# Altium PCB USB TO TTL PCB.PcbDoc
Units mm, origin at the board's own origin, x right, y up, seen from the top; angles counter-clockwise.
Board outline 60 x 50 mm, 4 copper layers (Top Layer, Layer 1, Layer 2, Bottom Layer), stack 1.592 mm thick; 41 components, 29 nets, 208 pads, 64 vias.
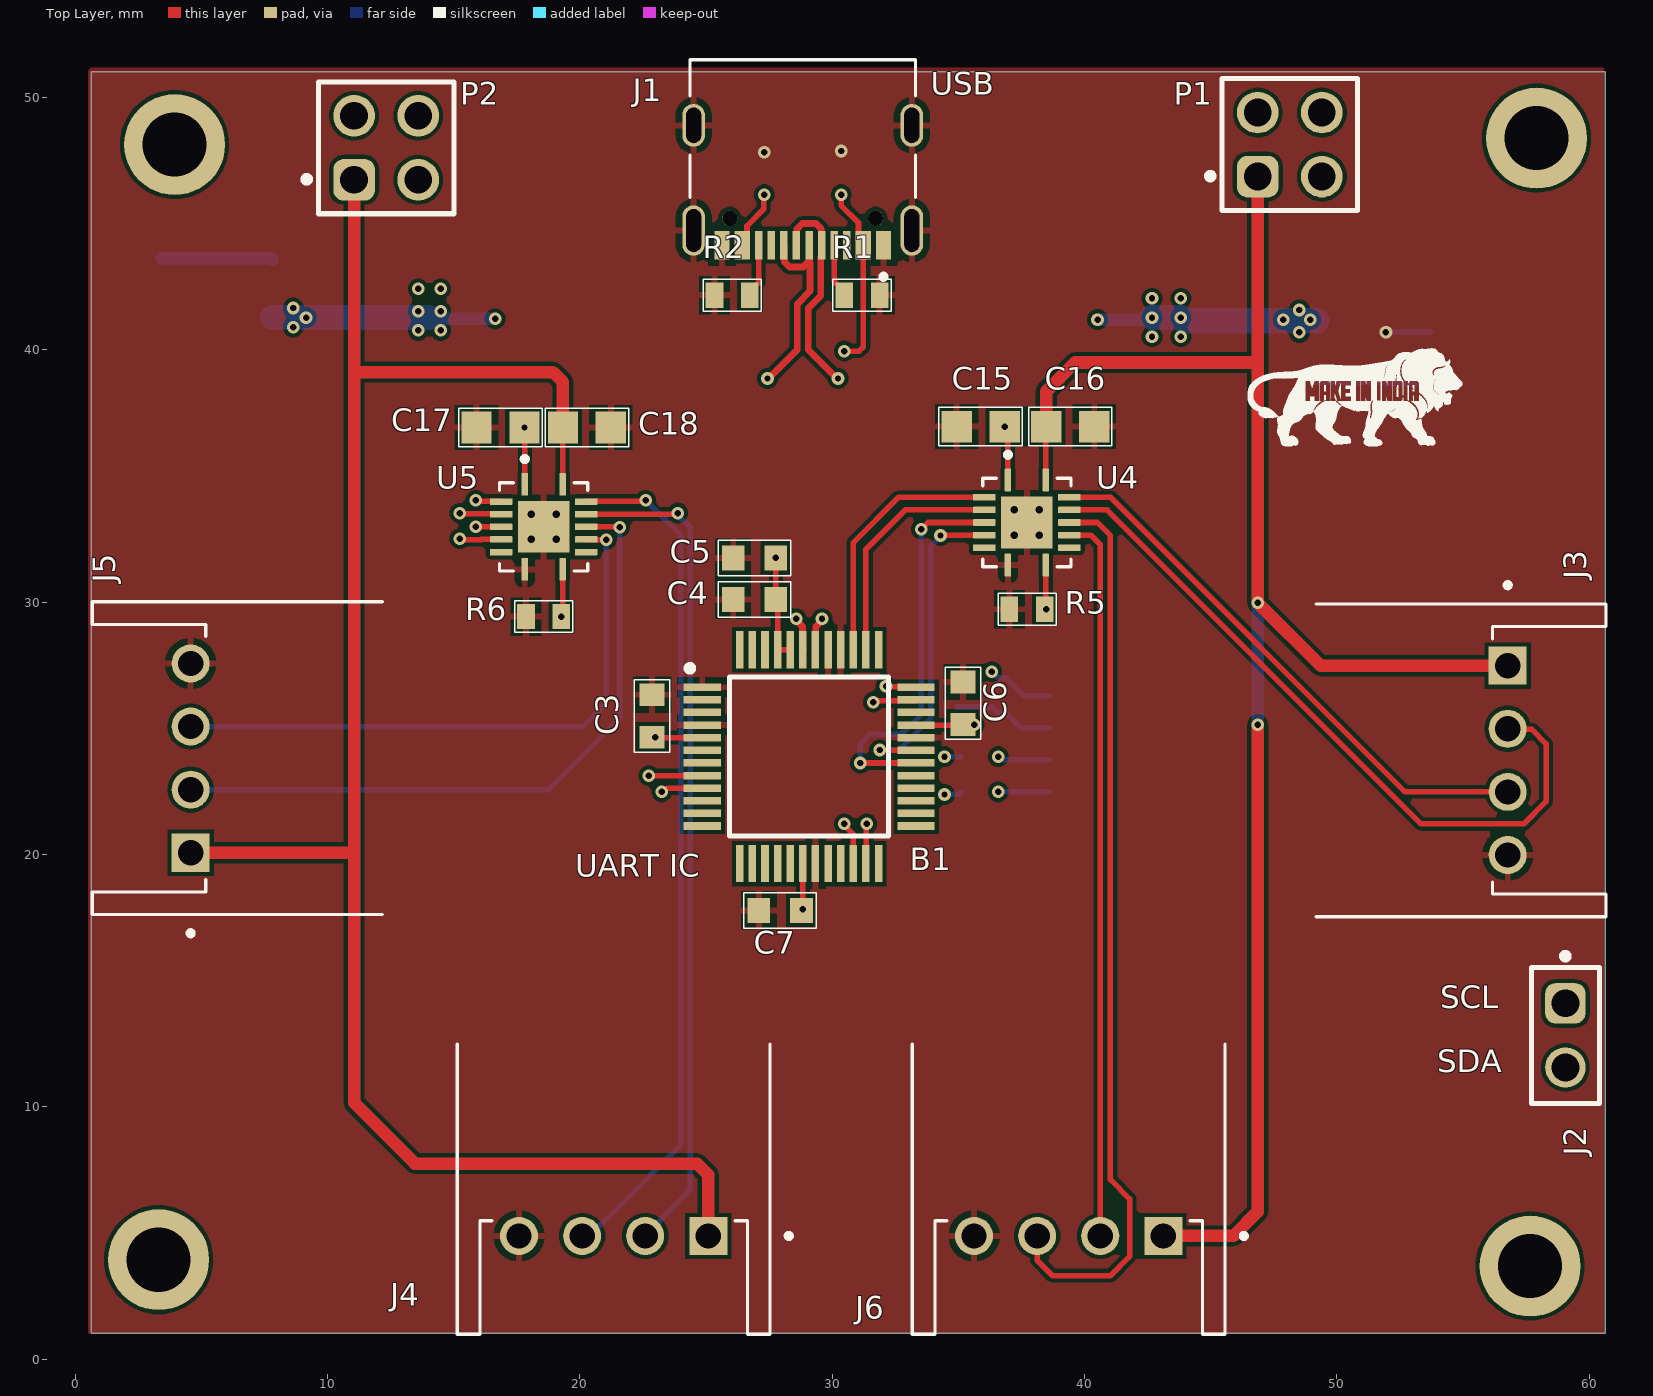
[diagram p0: Top Layer view]
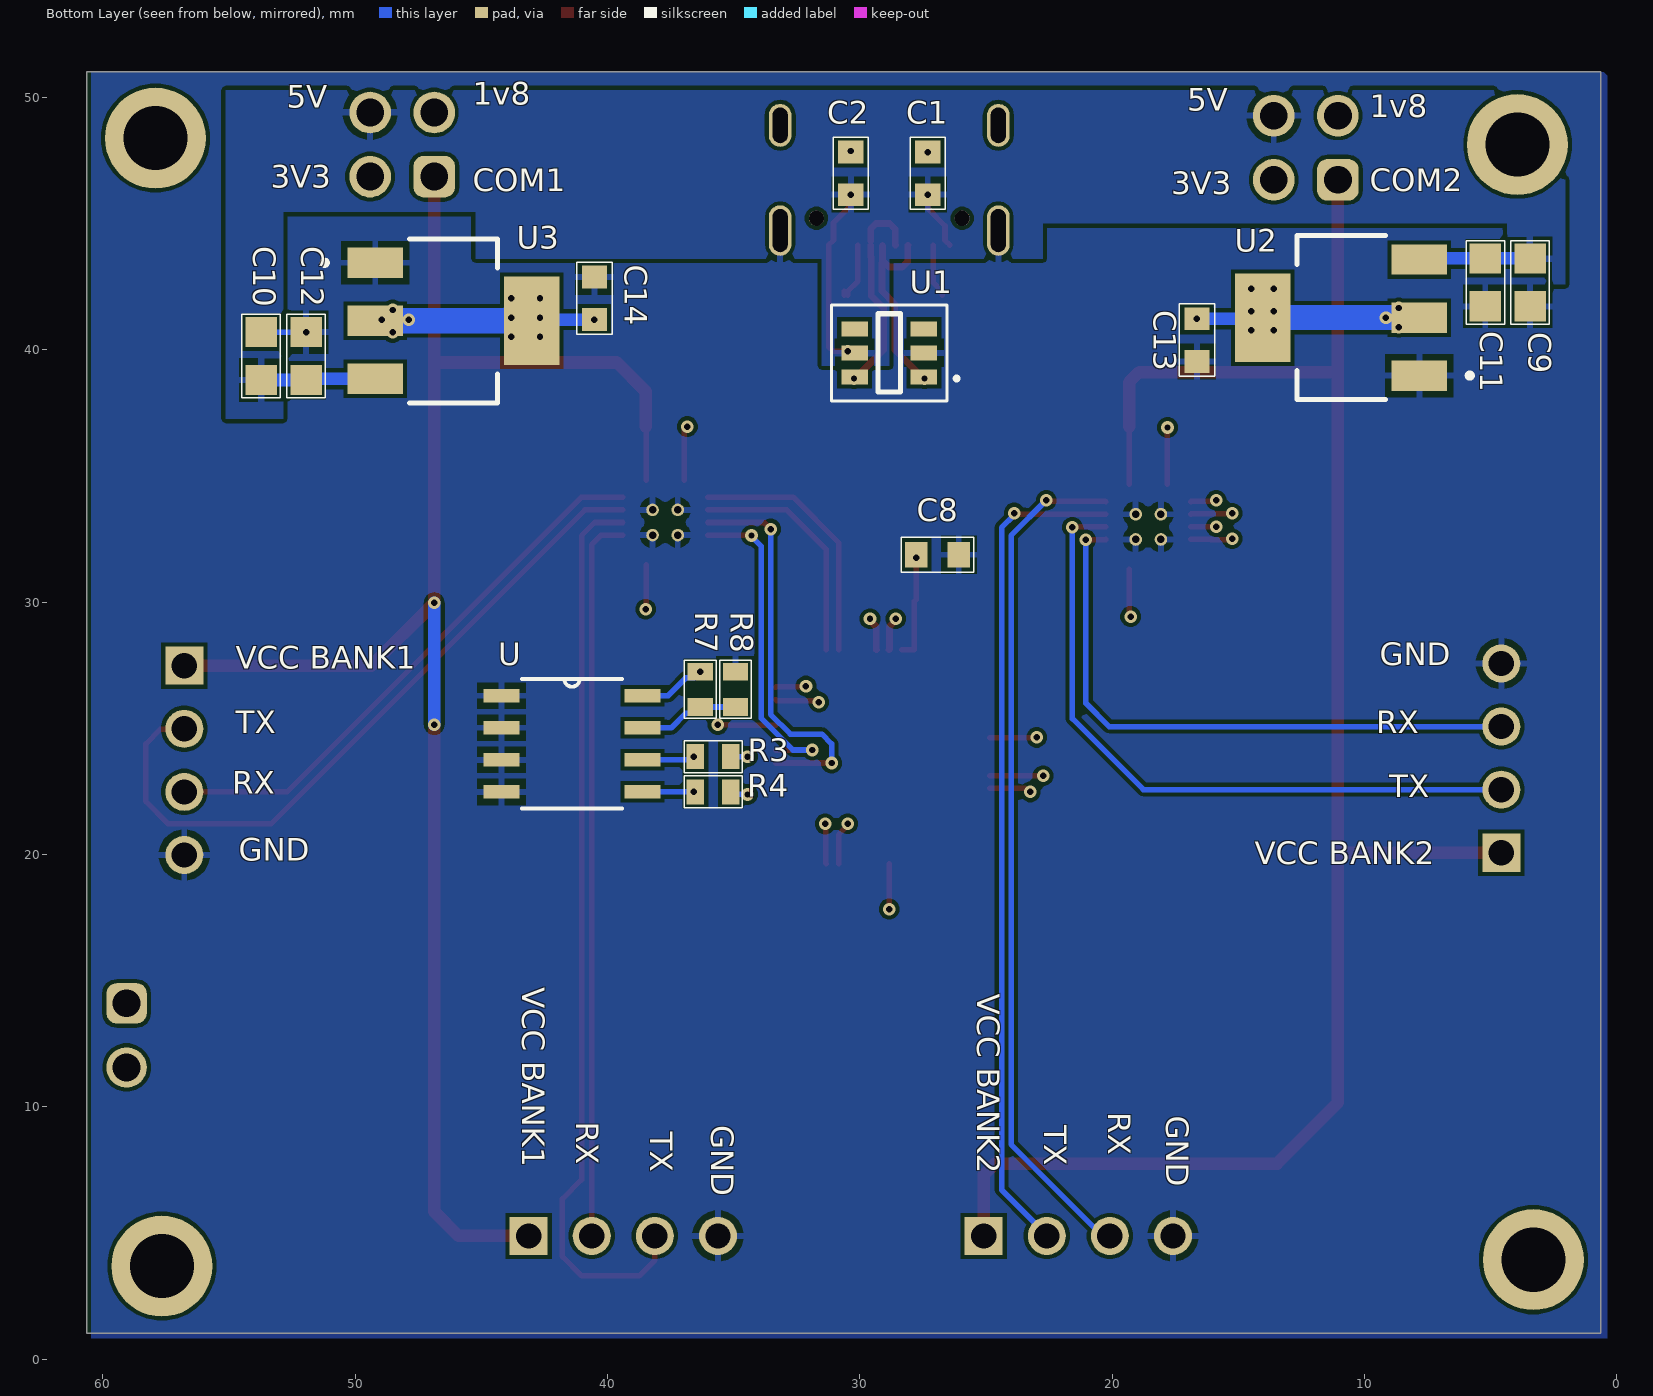
[diagram p1: Bottom Layer view, seen from below]
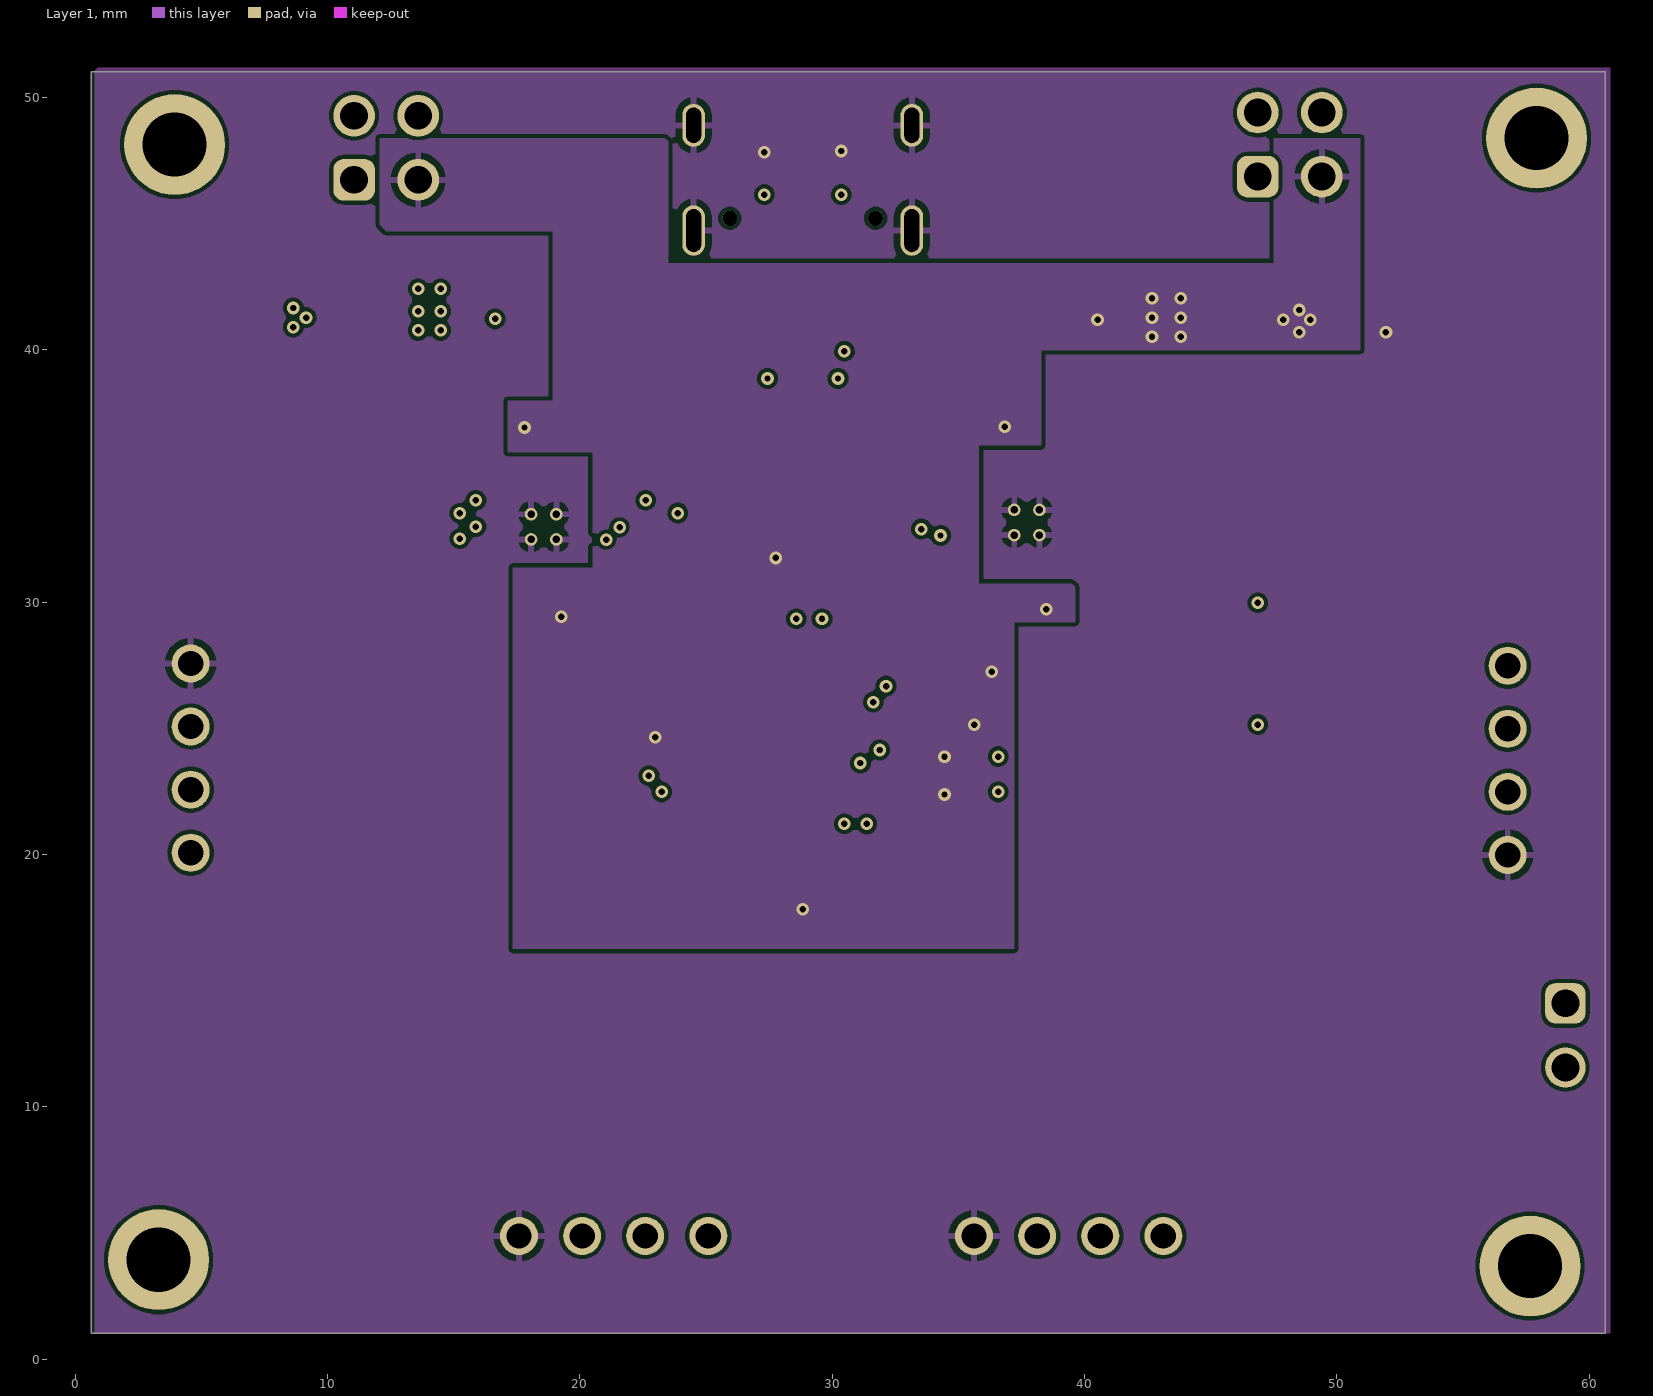
[diagram p2: Layer 1]
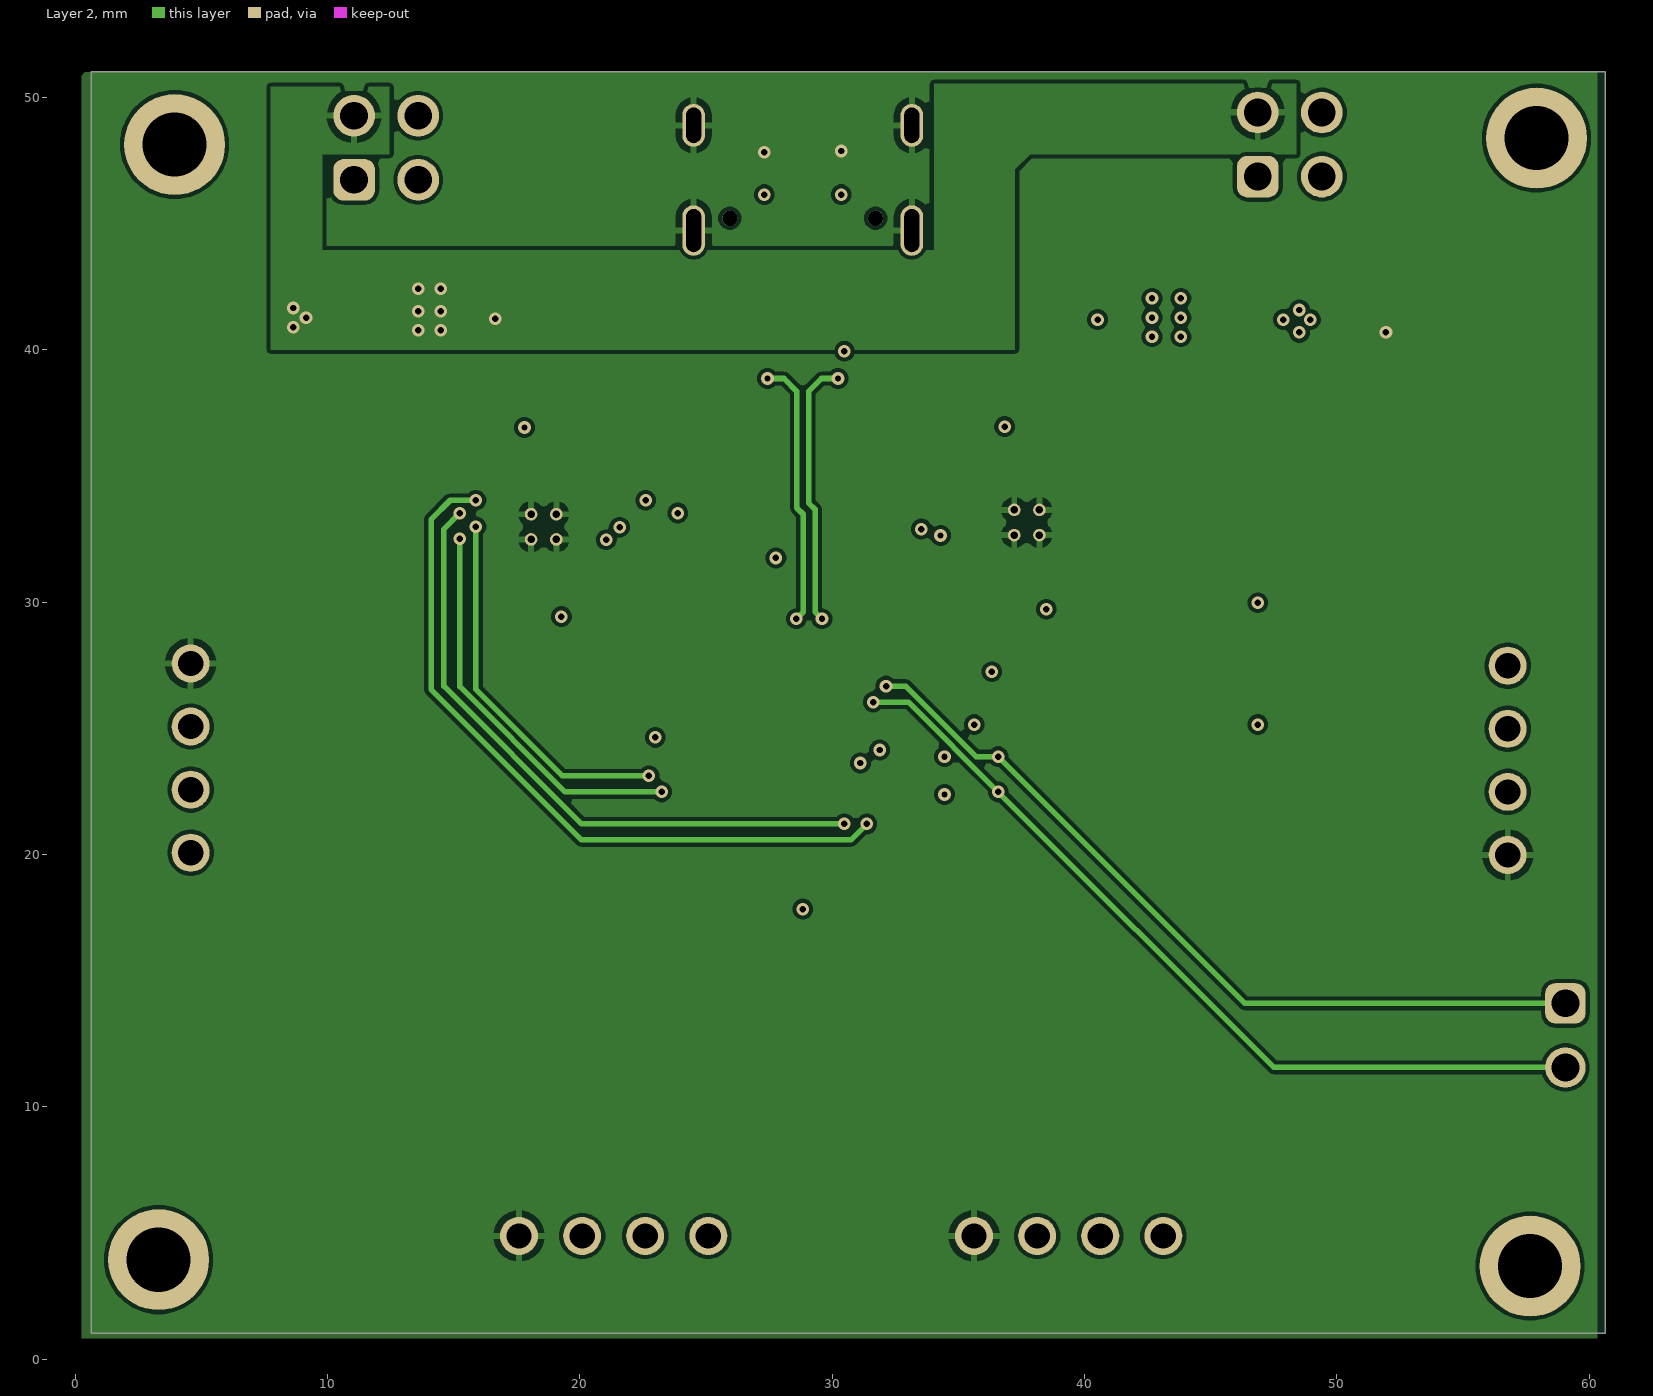
[diagram p3: Layer 2]
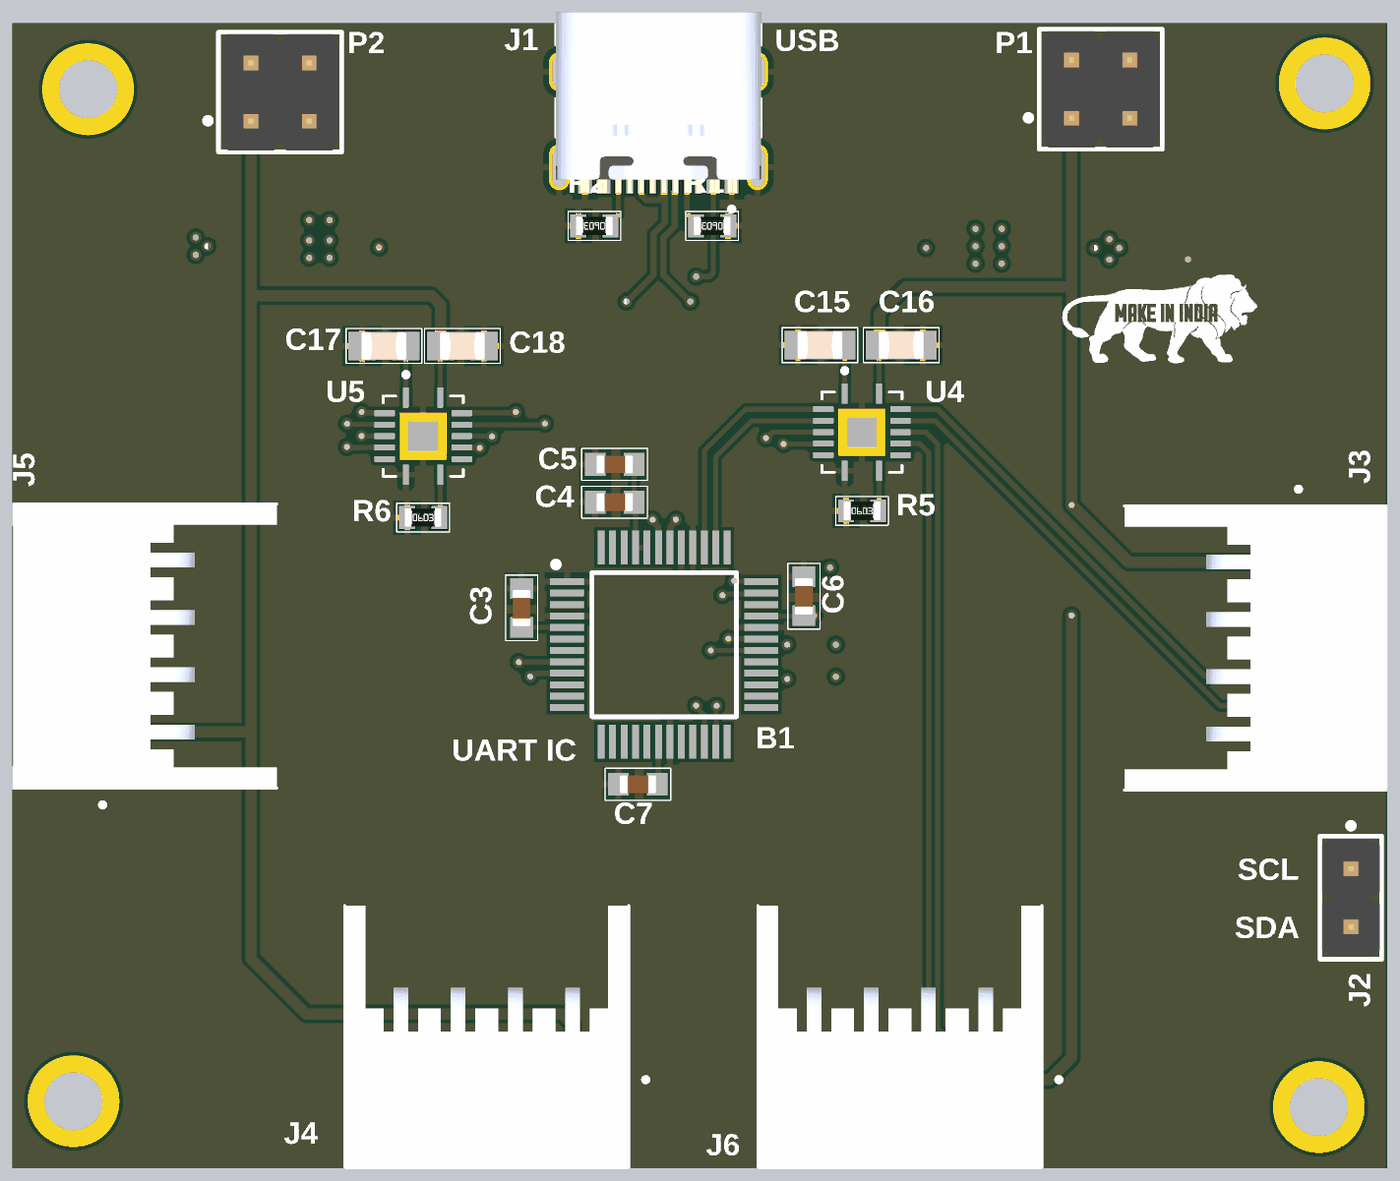
[diagram p4: 3D render of the assembled board from above, using the file's embedded part models]
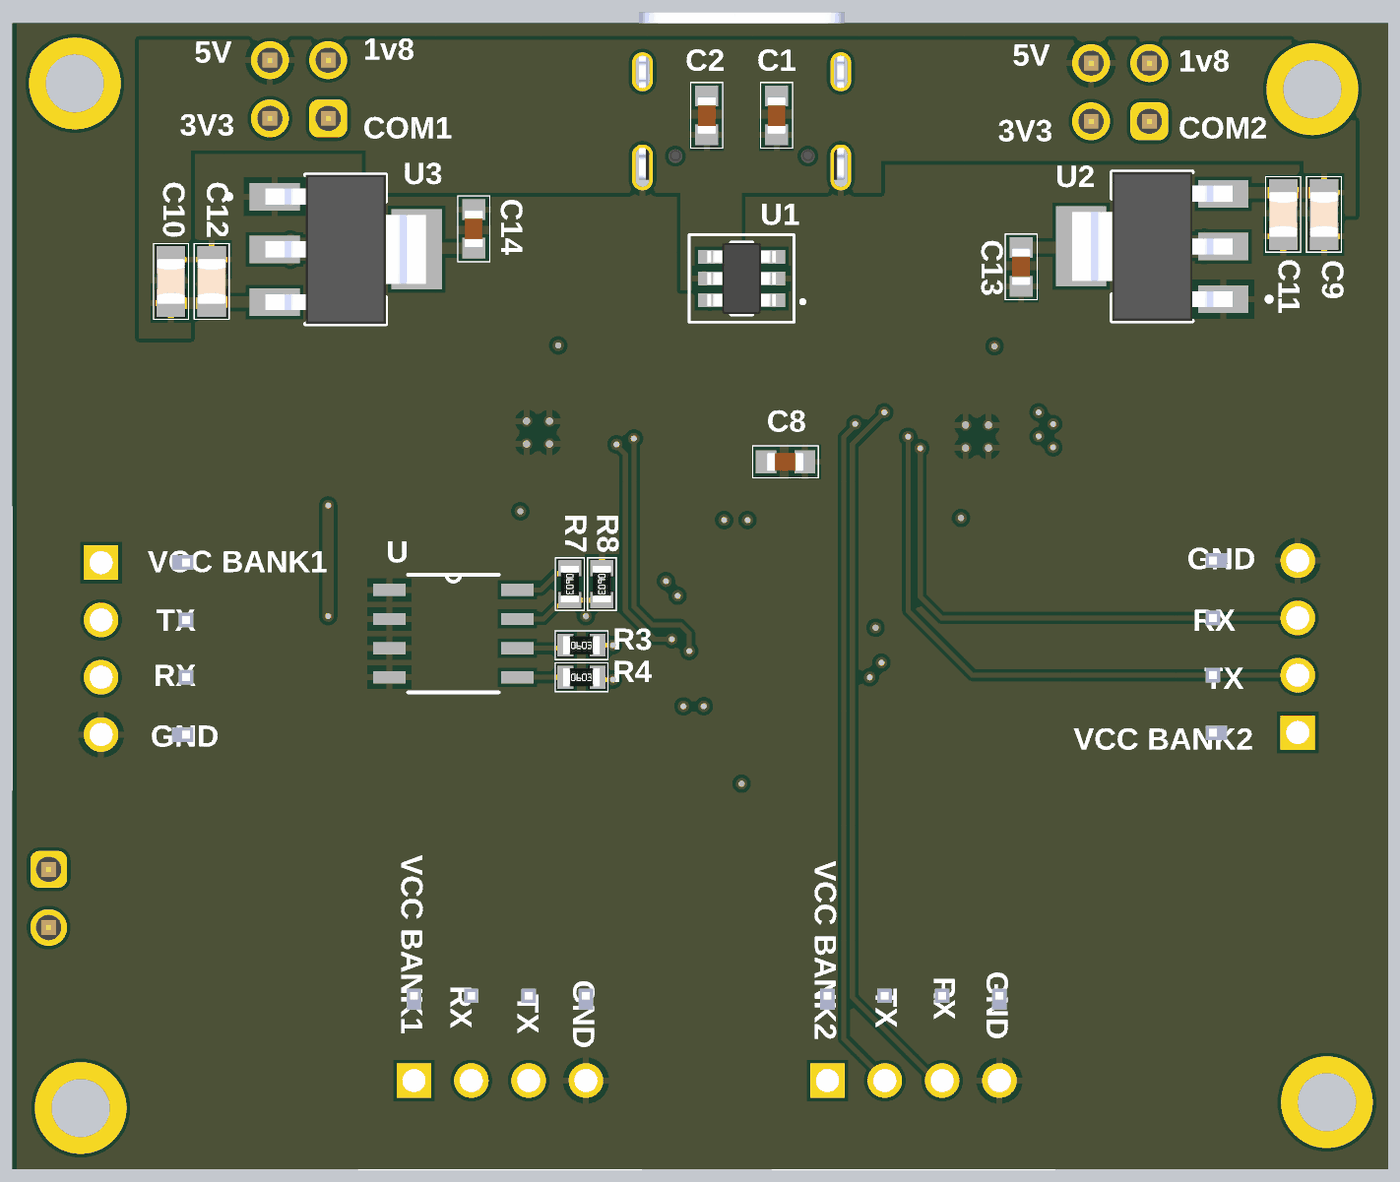
[diagram p5: 3D render of the assembled board from below, using the file's embedded part models]

## Layer stack, top to bottom
Top Solder: solder mask 0.0102, Solder Resist, Dk 3.5
Top Layer: signal copper 0.0356
Dielectric 2: prepreg 0.2104, PP-023, Dk 4.5
Layer 1: signal copper 0.0175
Dielectric 1: core 1.065, FR-4, Dk 4.8
Layer 2: signal copper 0.0175
Dielectric 3: prepreg 0.2104, PP-023, Dk 4.5
Bottom Layer: signal copper 0.0356
Bottom Solder: solder mask 0.0102, Solder Resist, Dk 3.5

## Board outline
0.635,1.016 0.635,51.016 60.635,51.016 60.635,1.016

## Design rules (kind name [scope] priority, off if disabled: settings)
Clearance [All] p1: gap=0.152 ignorepadtopadclearanceinfootprint=FALSE
DiffPairsRouting [InDifferentialPair('USB_D')] p1: maxlimit=0.25 minlimit=0.16 mostfreqgap=0.25 toplayer_maxgap=0.16 toplayer_prefgap=0.16 toplayer_minwidth=0.271 toplayer_maxwidth=0.271 toplayer_prefwidth=0.271 midlayer1_mingap=0.25 midlayer1_minwidth=0.221 midlayer1_maxwidth=0.221 midlayer1_prefwidth=0.221 midlayer2_mingap=0.25 midlayer2_minwidth=0.221 midlayer2_maxwidth=0.221 midlayer2_prefwidth=0.221 bottomlayer_maxgap=0.16 bottomlayer_prefgap=0.16 bottomlayer_minwidth=0.271 bottomlayer_maxwidth=0.271 bottomlayer_prefwidth=0.271 impedanceprofiledriven=TRUE impedanceprofileid={E888E90C-330D-45A3-A2FA-52E188DBEA7C} impedanceprofilevalue=90.000000 maxuncoupledlength=12.7
HoleToHoleClearance [All] p1: gap=0.305 allowstackedmicrovias=TRUE
PlaneClearance [All] p1: clearance=0.5
PlaneConnect [All] p1: pad.planeconnectstyle=Relief pad.reliefexpansion=0.508 pad.reliefentries=4 pad.reliefconductorwidth=0.254 pad.reliefairgap=0.254 via.planeconnectstyle=Direct via.reliefexpansion=0.508 via.reliefentries=4 via.reliefconductorwidth=0.254 via.reliefairgap=0.254
PolygonConnect [All] p1: thpad.connectstyle=Relief thpad.reliefconductorwidth=0.254 thpad.reliefentries=4 thpad.polygonreliefangle="90 Angle" thpad.airgapwidth=0.254 smdpad.connectstyle=Relief smdpad.reliefconductorwidth=0.254 smdpad.reliefentries=4 smdpad.polygonreliefangle="90 Angle" smdpad.airgapwidth=0.254 via.connectstyle=Direct via.reliefconductorwidth=0.254 via.reliefentries=4 via.polygonreliefangle="90 Angle" via.airgapwidth=0.254
RoutingVias [All] p1: holewidth=0.254 width=0.5 viastyle="Through Hole" minholewidth=0.2 minwidth=0.305 maxholewidth=0.5 maxwidth=1
SolderMaskExpansion [ISVIA] p1: expansion=0.102 istentingtop=TRUE
SupplyNets "Schematic Supply Nets_5" [InNet('+1V8')] p1: voltage=0.000
SupplyNets "Schematic Supply Nets_4" [InNet('+3V3')] p2: voltage=0.000
SupplyNets "Schematic Supply Nets_3" [InNet('GND')] p3: voltage=0.000
SupplyNets "Schematic Supply Nets_2" [InNet('+5V')] p4: voltage=0.000
SupplyNets "Schematic Supply Nets_1" [InNet('VCCB_BANK2')] p5: voltage=0.000
SupplyNets "Schematic Supply Nets" [InNet('VCCB_BANK1')] p6: voltage=0.000
Width [All] p1: maxlimit=2 minlimit=0.2 preferedwidth=0.254
26 further rules are at their usual default settings.

## Classes and differential pairs
differential pair USB_D: +USB_D_P -USB_D_N

## Components (designator, comment, footprint, x,y, rotation, side; value= is the part's Value field where it differs from the comment)
B1 "XR21V1414IM48TR-F" QFP50P900X900X120-48N 29.083,23.876 r0 top
C1 "0.1 µF" CAPC1608X90N 27.305,46.99 r90 bottom value=0.1uF
C2 "33 pF" CAPC1608X90N 30.353,46.99 r90 bottom value=33pF
C3 "0.1 µF" CAPC1608X90N 22.86,25.478 r90 top value=0.1µF
C4 "0.1 µF" CAPC1608X90N 26.924,30.099 r180 top value=0.1µF
C5 "0.1 µF" CAPC1608X90N 26.924,31.75 r180 top value=0.1µF
C6 "33 pF" CAPC1608X90N 35.179,25.986 r90 top value=33pF
C7 "33 pF" CAPC1608X90N 27.94,17.78 r180 top value=33pF
C8 "33 pF" CAPC1608X90N 26.924,31.877 r180 bottom value=33pF
C9 "10 µF" CAP-0805 3.429,42.672 r270 bottom value=10µF
C10 "10 µF" CAP-0805 53.721,39.751 r90 bottom value=10µF
C11 "0.1 µF" CAP-0805 5.207,42.672 r270 bottom value=0.1µF
C12 "0.1 µF" CAP-0805 51.943,39.751 r90 bottom value=0.1µF
C13 "22 µF" CAPC1608X90N 16.637,40.386 r270 bottom value=22µF
C14 "22 µF" CAPC1608X90N 40.513,42.037 r90 bottom value=22µF
C15 "0.1 µF" CAP-0805 35.88,36.957 r180 top value=0.1µF
C16 "0.1 µF" CAP-0805 39.431,36.957 r0 top value=0.1µF
C17 "0.1 µF" CAP-0805 16.85,36.919 r180 top value=0.1µF
C18 "0.1 µF" CAP-0805 20.274,36.919 r0 top value=0.1µF
J1 "TYPE-C-31-M-12" HRO_TYPE-C-31-M-12 28.829,48.895 r180 top
J2 "61300211121" 61300211121 59.055,12.827 r270 top
J3 "S4B-XH-A-1" JST_S4B-XH-A-1 54.919,23.729 r270 top
J4 "S4B-XH-A-1" JST_S4B-XH-A-1 21.336,6.731 r180 top
J5 "S4B-XH-A-1" JST_S4B-XH-A-1 6.422,23.816 r90 top
J6 "S4B-XH-A-1" JST_S4B-XH-A-1 39.37,6.731 r180 top
P1 "61300421121" 61300421121 48.133,48.133 r0 top
P2 "61300421121" 61300421121 12.319,48.006 r0 top
R1 "5.1 kOhms ERA-3ARW512V" RES-0603 31.177,42.164 r180 top value="5.1K 0603"
R2 "5.1 kOhms ERA-3ARW512V" RES-0603 26.035,42.164 r180 top value="5.1K 0603"
R3 "10 kOhms" RES-0603 35.814,23.876 r180 bottom
R4 "10 kOhms" RES-0603 35.814,22.479 r180 bottom
R5 "1 kOhms" RES-0603 37.719,29.718 r0 top
R6 "1 kOhms" RES-0603 18.562,29.426 r0 top
R7 "0 Ohm" RES-0603 36.322,26.543 r270 bottom value=DNP
R8 "0 Ohm" RES-0603 34.925,26.543 r270 bottom value=DNP
U "M24C02-WMN6TP" SOIC127P600X175-8N 41.402,24.384 r180 bottom
U1 "SYT05S05ABC" SYT05S05ABC 28.829,39.878 r0 bottom
U2 "AZ1117IH-1.8TRG1" SOT230P700X185-4N 10.922,41.275 r0 bottom
U3 "AZ1117IH-3.3TRG1" SOT230P700X185-4N 46.101,41.148 r180 bottom
U4 "TXB0104RGYR" QFN50P350X350X100-15N 37.711,33.155 r270 top
U5 "TXB0104RGYR" QFN50P350X350X100-15N 18.562,32.982 r270 top

## Footprints (in the part's own frame and the unit in brackets; to place one, negate y for a bottom-side part, rotate by r counter-clockwise, add the part's x,y. Pads: shape width x height; smd on the part's side, far side on the other; paste and mask are expansions set on the pad)
61300211121 [mm] "Pin Header, pitch 2.54 mm, THT, Vertical, single row, 2p"
  rrect50% 1.6x1.6 hole 1.1: 1(-1.27,0)
  round 1.6 hole 1.1: 2(1.27,0)
  silkscreen extent -3.26,-1.35 2.69,1.35, body extent -2.54,-1.27 2.54,1.27, height 8.57
61300421121 [mm] "Pin Header, pitch 2.54 mm, THT, Vertical, dual row, 4p"
  rrect50% 1.65x1.65 hole 1.1: 1(-1.27,-1.27)
  round 1.65 hole 1.1: 2(-1.27,1.27) 3(1.27,-1.27) 4(1.27,1.27)
  silkscreen extent -3.27,-2.62 2.69,2.62, body extent -2.54,-2.54 2.54,2.54, height 8.59
CAP-0805 [mm]
  rect 1.2x1.25 smd mask+0.05: 1(-0.95,0) 2(0.95,0)
  silkscreen extent -1.65,-0.76 1.65,0.76, body extent -1,-0.63 1,0.63, height 0.81
CAPC1608X90N [mm]
  rect 0.9x1 smd: 1(-0.84,0) 2(0.85,0)
  silkscreen extent -1.43,-0.7 1.44,0.7, body extent -0.8,-0.4 0.8,0.4, height 0.95
HRO_TYPE-C-31-M-12 [mm]
  rect 0.6x1.14 smd mask+0.05: A1_B12(-3.2,4.75) A4_B9(-2.4,4.75) B1_A12(3.2,4.75) B4_A9(2.4,4.75)
  rect 0.3x1.14 smd mask+0.05: A5(-1.25,4.75) A6(-0.25,4.75) A7(0.25,4.75) A8(1.25,4.75) B5(1.75,4.75) B6(0.75,4.75) B7(-0.75,4.75) B8(-1.75,4.75)
  oval 0.9x2 hole 0.6 slot 1.7 at 90 deg: S1(-4.325,4.17) S2(4.325,4.17)
  oval 0.9x1.7 hole 0.6 slot 1.4 at 90 deg: S3(-4.325,0) S4(4.325,0)
  round 0.6 hole 0.6 unplated: ""(-2.89,3.68) ""(2.89,3.68)
  silkscreen extent -4.47,-2.6 4.47,6.1, body extent -4.47,-2.6 4.47,5.31, height 3.31
JST_S4B-XH-A-1 [mm]
  rect 1.508x1.508 / inner round 1.508 / far side rect 1.508x1.508 hole 1: 1(-3.75,1.85)
  round 1.508 hole 1: 2(-1.25,1.85) 3(1.25,1.85) 4(3.75,1.85)
  silkscreen extent -7.04,-5.75 6.2,5.75, body extent -6.2,-5.75 6.2,5.75, height 6.1
QFN50P350X350X100-15N [mm]
  rrect25% 0.9x0.26 smd: 1(-1.685,-0.75) 7(1.685,-0.75) 8(1.685,0.75) 14(-1.685,0.75)
  rrect25% 0.26x0.9 smd: 2(-1,-1.685) 3(-0.5,-1.685) 4(0,-1.685) 5(0.5,-1.685) 6(1,-1.685) 9(1,1.685) 10(0.5,1.685) 11(0,1.685) 12(-0.5,1.685) 13(-1,1.685)
  rect 2.05x2.05 smd paste-2: 15(0,0)
  round 0.5 hole 0.3 mask+0: 16(-0.5,0.5) 17(0.5,0.5) 18(0.5,-0.5) 19(-0.5,-0.5)
  silkscreen extent -2.78,-1.75 1.75,1.75
QFP50P900X900X120-48N [mm]
  rect 1.475x0.3 smd: 1(-4.238,2.75) 2(-4.238,2.25) 3(-4.238,1.75) 4(-4.238,1.25) 5(-4.238,0.75) 6(-4.238,0.25) 7(-4.238,-0.25) 8(-4.238,-0.75) 9(-4.238,-1.25) 10(-4.238,-1.75) 11(-4.238,-2.25) 12(-4.238,-2.75) 25(4.238,-2.75) 26(4.238,-2.25) 27(4.238,-1.75) 28(4.238,-1.25) 29(4.238,-0.75) 30(4.238,-0.25) 31(4.238,0.25) 32(4.238,0.75) 33(4.238,1.25) 34(4.238,1.75) 35(4.238,2.25) 36(4.238,2.75)
  rect 0.3x1.475 smd: 13(-2.75,-4.238) 14(-2.25,-4.238) 15(-1.75,-4.238) 16(-1.25,-4.238) 17(-0.75,-4.238) 18(-0.25,-4.238) 19(0.25,-4.238) 20(0.75,-4.238) 21(1.25,-4.238) 22(1.75,-4.238) 23(2.25,-4.238) 24(2.75,-4.238) 37(2.75,4.238) 38(2.25,4.238) 39(1.75,4.238) 40(1.25,4.238) 41(0.75,4.238) 42(0.25,4.238) 43(-0.25,4.238) 44(-0.75,4.238) 45(-1.25,4.238) 46(-1.75,4.238) 47(-2.25,4.238) 48(-2.75,4.238)
  silkscreen extent -4.85,-3.15 3.15,3.62
RES-0603 [mm]
  rect 0.7x1 smd mask+0.05: 1(-0.7,0) 2(0.7,0)
  silkscreen extent -1.15,-0.63 1.15,0.63, body extent -0.8,-0.4 0.8,0.4, height 0.47
SOIC127P600X175-8N [mil]
  rect 56x21 smd: 1(-110,75) 2(-110,25) 3(-110,-25) 4(-110,-75) 5(110,-75) 6(110,-25) 7(110,25) 8(110,75)
  silkscreen extent -78,-101 78,101
SOT230P700X185-4N [mm]
  rect 2.2x1.2 smd: 1(-3.1,2.3) 2(-3.1,0) 3(-3.1,-2.3)
  rect 2.2x3.5 smd: 4(3.1,0)
  silkscreen extent -5.2,-3.25 1.75,3.25, body extent -3.5,-3.25 3.5,3.25, height 1.65
SYT05S05ABC [mm] "SOT23, 6-Leads, Body 2.95x2.85mm, Pitch 0.95mm, IPC Medium Density"
  rect 1.05x0.6 smd: 1(-1.375,0.95) 2(-1.375,0) 3(-1.375,-0.95) 4(1.375,-0.95) 5(1.375,0) 6(1.375,0.95)
  silkscreen extent -2.75,-1.91 2.29,1.91, body extent -1.5,-1.55 1.5,1.55, height 1.3

## Part data
B1: library part XR21V1414IM48-F, "USB Interface IC 4-Ch 12Mbps 48MHz Internal clock; UART", Manufacturer_Name="MaxLinear, Inc.", Mouser Part Number=701-XR21V1414IM48-F, Arrow Part Number=XR21V1414IM48-F, Arrow Price/Stock=https://www.arrow.com/en/products/xr21v1414im48-f/maxlinear-inc?region=nac, Datasheet Link=https://www.maxlinear.com/document?id=1416, Geometry.Height=1.2mm, Manufacturer_Part_Number=XR21V1414IM48-F, Mouser Price/Stock=https://www.mouser.co.uk/ProductDetail/MaxLinear/XR21V1414IM48-F?qs=ffYlDyDpdDVv7svdbXLjeg%3D%3D
C1: library part CC0603KRX7R0BB104, "0.1 µF ±10% 100V Ceramic Capacitor X7R 0603 (1608 Metric)", Package=0603, Supplier Part Number 1=5049188, Supplier 1="Future Electronics"
C2 C6 C7 C8: library part KGM15ACG1H330JT, "33 pF ±5% 50V Ceramic Capacitor C0G, NP0 0603 (1608 Metric)", Package=0603, Supplier 1="Arrow Electronics", Supplier Part Number 1=KGM15ACG1H330JT
C3 C4 C5: library part C0603C104J5RAC7867, "0.1 µF ±5% 50V Ceramic Capacitor X7R 0603 (1608 Metric)", Package=0603, Supplier Part Number 1=80-C0603C104J5R, Supplier 1=Mouser
C9 C10: library part GRM21BR61H106KE43K, "10 µF ±10% 50V Ceramic Capacitor X5R 0805 (2012 Metric)", Package=0805, Supplier Part Number 1=81-GRM21BR61H106KE3K, Supplier 1=Mouser
C11 C12 C15 C16 C17 C18: library part C0805C104K1RACTU, "0.1 µF ±10% 100V Ceramic Capacitor X7R 0805 (2012 Metric)", Package=0805, Supplier Part Number 1=80-C0805C104K1R, Supplier 1=Mouser
C13 C14: library part GRM188R61A226ME15J, "22 µF ±20% 10V Ceramic Capacitor X5R 0603 (1608 Metric)", Package=0603, Supplier Part Number 1=8126166, Supplier 1="Future Electronics"
J1: "USB Connectors 24 Receptacle 1 8.94*7.3mm RoHS", Package=Package, Availability="Not in stock", Check_prices=https://www.snapeda.com/parts/TYPE-C-31-M-12/HRO+Electronics+Co.%252C+Ltd./view-part/?ref=eda, MF="HRO Electronics Co., Ltd.", MP=TYPE-C-31-M-12, Price=None, SnapEDA_Link=https://www.snapeda.com/parts/TYPE-C-31-M-12/HRO+Electronics+Co.%252C+Ltd./view-part/?ref=snap
J2: "WR-PHD Pin Header, THT, Vertical, pitch 2.54mm, 1 Row, 2P", Contact Resistance=20mOhm, Manufacturer="Wurth Elektronik", Operating Temperature Max=105°C, Operating Temperature Min=-40°C, Rated Current=3A, Withstanding Voltage=500V, Working Voltage=250V, Category="Board-to-Board Connectors", ComponentLink1Description="Website Link", ComponentLink1URL=https://www.we-online.com/redexpert/article/61300211121?ad, ComponentLink2Description="Datasheet Link", ComponentLink2URL=https://www.we-online.com/redexpert/spec/61300211121?ad, Gender="Pin Header", Manufacturer Part Number=61300211121, Match Code=WR-PHD, Mount="Through Hole", Number of Pins=2, Number of Rows=1, Orientation=Vertical, Packaging=Bag, Pitch=2.54mm
J3 J4 J5 J6: "Connector Header Through Hole, Right Angle 4 position 0.098 (2.50mm)", Package=None, Check_prices=https://www.snapeda.com/parts/S4B-XH-A-1/JST+Sales+America+Inc./view-part/?ref=eda, MF="JST Sales", MP=S4B-XH-A-1, SnapEDA_Link=https://www.snapeda.com/parts/S4B-XH-A-1/JST+Sales+America+Inc./view-part/?ref=snap
P1 P2: "WR-PHD Pin Header, THT, Vertical, pitch 2.54mm, 2 Row, 4P", Contact Resistance=20mOhm, Manufacturer="Wurth Elektronik", Operating Temperature Max=105°C, Operating Temperature Min=-40°C, Rated Current=3A, Withstanding Voltage=500V, Working Voltage=250V, Category="Board-to-Board Connectors", ComponentLink1Description="Website Link", ComponentLink1URL=https://www.we-online.com/redexpert/article/61300421121?ad, ComponentLink2Description="Datasheet Link", ComponentLink2URL=https://www.we-online.com/redexpert/spec/61300421121?ad, Gender="Pin Header", Manufacturer Part Number=61300421121, Match Code=WR-PHD, Mount="Through Hole", Number of Pins=4, Number of Rows=2, Orientation=Vertical, Packaging=Bag, Pitch=2.54mm
R1 R2: library part RC0603FR-071KL, "ERA-3ARW512V / 5.1 kOhms ±0.05% 0.1W, 1/10W Chip Resistor 0603 (1608 Metric) Automotive AEC-Q200 Thin Film", Package=0603, Supplier Part Number 1=4016291, Supplier 1="Future Electronics"
R3 R4: library part RC0603FR-0710KL, "10 kOhms ±1% 0.1W, 1/10W Chip Resistor 0603 (1608 Metric) Moisture Resistant Thick Film", Package=0603, Supplier Part Number 1=4023214, Supplier 1="Future Electronics"
R5 R6: library part RC0603FR-071KL, "1 kOhms ±1% 0.1W, 1/10W Chip Resistor 0603 (1608 Metric) Moisture Resistant Thick Film", Package=0603, Supplier Part Number 1=4016291, Supplier 1="Future Electronics"
R7 R8: library part RC0603JR-070RL, "0 Ohm Jumper Chip Resistor 0603 (1608 Metric) Moisture Resistant Thick Film", Package=0603, Supplier Part Number 1=3992146, Supplier 1="Future Electronics"
U: "EEPROM Memory IC 2Kb _256 x 8_ IÂ²C 400kHz 900ns 8-SO", Package="SO-8 STMicroelectronics", MF=STMicroelectronics, MP=M24C02-WMN6TP, SnapEDA_Link=https://www.snapeda.com/parts/M24C02-WMN6TP/STMicroelectronics/view-part/259987/?ref=snap
U1: "ESD Protection - USB2.0 Power and Data Line Protection"
U2: library part AZ1117IH-3.3TRG1, "Linear Voltage Regulator IC Positive Fixed 1 Output 1A SOT-223-3 / 1.8v", Package="SOT-223 Diodes Inc.", Availability="In Stock", Check_prices=https://www.snapeda.com/parts/AZ1117IH-3.3TRG1/Diodes+Inc./view-part/?ref=eda, MF="Diodes Inc.", MP=AZ1117IH-3.3TRG1, Price=None, Purchase-URL=https://pricing.snapeda.com/search/part/AZ1117IH-3.3TRG1/?ref=eda, SnapEDA_Link=https://www.snapeda.com/parts/AZ1117IH-3.3TRG1/Diodes+Inc./view-part/?ref=snap
U3: "Linear Voltage Regulator IC Positive Fixed 1 Output 1A SOT-223-3", Package="SOT-223 Diodes Inc.", Availability="In Stock", Check_prices=https://www.snapeda.com/parts/AZ1117IH-3.3TRG1/Diodes+Inc./view-part/?ref=eda, MF="Diodes Inc.", MP=AZ1117IH-3.3TRG1, Price=None, Purchase-URL=https://pricing.snapeda.com/search/part/AZ1117IH-3.3TRG1/?ref=eda, SnapEDA_Link=https://www.snapeda.com/parts/AZ1117IH-3.3TRG1/Diodes+Inc./view-part/?ref=snap
U4 U5: "4-Bit Bidirectional Voltage-Level Shifter with Auto Direction Sensing and +/-15 kV ESD Protect 14-VQFN -40 to 85", Package=None, Availability=Unavailable, MP=TXB0104RGYR, Price=None

## Free pads (board coordinates)
  round 4 hole 2.54: 1(3.302,3.937) 1(3.937,48.133) 1(57.658,3.683) 1(57.912,48.387)

## Via types
v1: diameter 0.5, hole 0.254, Top Layer to Bottom Layer, tented both sides, 64 vias

## Nets (pads, with @x,y where several pads share a name; then routed paths per layer and width w, separated by ;. In a path a pad name is that pad's centre, name@x,y a point inside that pad or via, vN(x,y) a via of type N, cw(c..) or ccw(c..) an arc to the next point about the centre after c; other vN are vias at no path point)
+1V8: C13.1 P1.2 P2.2 U2.2 U2.4 | length 9
  Bottom Layer w0.22: U2.2 7.822,41.2 U2.2@7.874,41.148
  Bottom Layer w0.5: U2.4 14.071,41.226 v1(16.637,41.226)
  Bottom Layer w1: U2.2 U2.4
  other v1: 13.589,40.767 14.478,40.767 8.636,40.894 9.144,41.275 13.589,41.529 14.478,41.529 8.636,41.656 13.589,42.418 14.478,42.418
+3V3: B1.5 B1.18 B1.33 B1.44 B1.45 C3.1 C4.1 C5.1 C6.1 C7.1 C8.1 C14.1 C15.1 C17.1 P1.3 P2.3 R3.2 R4.2 R5.2 R6.2 R7.1 U3.2 U3.4 U4.1 U4.8 U5.1 U5.8 U.8 | length 31.6
  Top Layer w0.22: U5.1 C17.1@17.812,36.907 ; v1(19.262,29.426) 19.312,29.476 U5.8 ; C3.1 v1(22.987,24.638) ; C3.1@22.987,24.626 B1.5 ; v1(27.764,31.75) C4.1 27.833,30.03 B1.45 B1.44 ; C7.1 v1(28.833,17.833) B1.18 ; B1.33 35.159,25.126 C6.1 35.62,25.146 v1(35.623,25.143) ; U4.1 C15.1@36.961,36.826 ; R5.2 v1(38.481,29.718) ; R5.2@38.45,29.749 38.461,29.76 U4.8
  Bottom Layer w0.22: v1(27.764,31.75) C8.1 ; v1(34.448,22.376) 35.011,22.376 R4.2 ; v1(34.448,23.876) R3.2 ; v1(36.322,27.243) 36.562,27.003 36.878,27.003 37.592,26.289 U.8
  Bottom Layer w0.5: v1(40.513,41.197) 42.594,41.197 v1(42.672,41.275) 42.672,41.248 42.723,41.197 42.911,41.197 42.96,41.148 U3.4
  Bottom Layer w1: v1(42.672,41.275) v1(43.815,41.275) 43.942,41.148 U3.2
  other v1: 17.8,36.919 36.83,36.957 42.672,40.513 43.815,40.513 48.514,40.689 47.879,41.197 48.947,41.197 48.514,41.578 42.672,42.037 43.815,42.037
+5V: C1.1 C2.1 C9.1 C10.1 C11.1 C12.1 J1.A4_B9 J1.B4_A9 P1.4 P2.4 U1.5 U2.3 U3.3 | length 18.5
  Top Layer w0.22: J1.B4_A9 26.619,44.335 26.619,44.907 27.282,45.57 27.282,46.127 v1(27.305,46.15) ; v1(30.353,46.15) 30.353,45.72 31.039,45.034 31.039,44.335 J1.A4_B9 31.229,40.119 31.059,39.949 v1(30.48,39.949)
  Bottom Layer w0.22: C12.1@51.896,38.848 C12.1
  Bottom Layer w0.5: C9.1 C11.1 7.775,43.622 U2.3 ; U3.3 C12.1@51.896,38.848 ; C12.1 C10.1
GND: B1.1 B1.4 B1.19 B1.32 B1.40 B1.41 C1.2 C2.2 C3.2 C4.2 C5.2 C6.2 C7.2 C8.2 C9.2 C10.2 C11.2 C12.2 C13.2 C14.2 C15.2 C16.2 C17.2 C18.2 J1.A1_B12 J1.B1_A12 J1.S1 J1.S2 J1.S3 J1.S4 J3.4 J4.4 J5.4 J6.4 R1.1 R2.2 R5.1 R6.1 R8.1 U1.2 U2.1 U3.1 U4.7 U4.15 U4.16 U4.17 U4.18 U4.19 U5.7 U5.15 U5.16 U5.17 U5.18 U5.19 U.1 U.2 U.3 U.4 | length 1.8
  Bottom Layer w0.22: v1(27.305,47.826) C1.2 ; C2.2 v1(30.353,47.879) ; v1(51.943,40.701) C10.2
NetB1_8: B1.8 U5.4 | length 17.8
  Top Layer w0.22: v1(15.875,32.99) 15.879,32.986 16.873,32.986 U5.4 ; v1(22.733,23.114) 22.739,23.12 24.839,23.12 B1.8
  Layer 2 w0.22: v1(15.875,32.99) 15.875,26.543 19.304,23.114 v1(22.733,23.114)
NetB1_9: B1.9 U5.5 | length 18.9
  Top Layer w0.22: v1(15.24,32.512) 15.274,32.478 16.087,32.478 16.092,32.482 U5.5 ; v1(23.241,22.479) 23.317,22.479 23.464,22.626 B1.9
  Layer 2 w0.22: v1(15.24,32.512) 15.24,26.651 19.412,22.479 v1(23.241,22.479)
NetB1_22: B1.22 U5.3 | length 28.6
  Top Layer w0.22: v1(15.24,33.524) 15.261,33.502 16.857,33.502 U5.3 ; v1(30.48,21.213) 30.48,21.138 30.833,20.785 B1.22
  Layer 2 w0.22: v1(15.24,33.524) 15.236,33.524 14.605,32.893 14.605,26.67 20.066,21.209 30.476,21.209 v1(30.48,21.213)
NetB1_23: B1.23 U5.2 | length 31.4
  Top Layer w0.22: v1(15.875,34.036) 15.909,34.002 16.857,34.002 U5.2 ; B1.23 31.351,19.656 31.351,21.191 v1(31.369,21.209)
  Layer 2 w0.22: v1(15.875,34.036) 14.859,34.036 14.097,33.274 14.097,26.543 20.066,20.574 30.734,20.574 v1(31.369,21.209)
NetB1_30: B1.30 U4.4 | length 15.8
  Top Layer w0.22: v1(31.115,23.622) 31.117,23.624 33.319,23.624 B1.30 ; v1(33.528,32.893) 33.535,32.893 33.797,33.155 U4.4
  Bottom Layer w0.22: v1(31.115,23.622) 31.115,24.384 31.496,24.765 32.747,24.765 33.528,25.546 v1(33.528,32.893)
NetB1_31: B1.31 U4.5 | length 13.1
  Top Layer w0.22: v1(31.877,24.138) 31.883,24.132 33.315,24.132 B1.31 ; v1(34.29,32.639) 34.298,32.647 36.018,32.647 U4.5
  Bottom Layer w0.22: v1(31.877,24.138) 32.647,24.138 33.9,25.391 33.9,32.208 34.29,32.598 v1(34.29,32.639)
NetB1_38: B1.38 U4.3 | length 9.3
  Top Layer w0.22: B1.38 31.333,32.095 32.893,33.655 U4.3
NetB1_39: B1.39 U4.2 | length 10.2
  Top Layer w0.22: B1.39 30.833,32.357 32.631,34.155 U4.2
NetJ1_A5: J1.A5 R1.2 | length 2.3
  Top Layer w0.22: J1.A5 30.079,42.712 30.477,42.314 R1.2 ; R1.2@30.604,42.164 R1.2@30.604,42.314
NetJ1_B5: J1.B5 R2.1 | length 2.1
  Top Layer w0.22: R2.1 26.735,42.314 27.079,42.658 J1.B5
NetJ3_2: J3.2 U4.12 | length 28.5
  Top Layer w0.22: U4.12 40.894,33.655 53.34,21.209 57.404,21.209 58.293,22.098 58.293,24.384 57.724,24.953 56.795,24.953 J3.2
NetJ3_3: J3.3 U4.13 | length 22.2
  Top Layer w0.22: U4.13 41.029,34.155 52.705,22.479 J3.3
NetJ4_2: J4.2 U5.12 | length 33.2
  Top Layer w0.22: U5.12 23.83,33.482 v1(23.876,33.528)
  Bottom Layer w0.22: J4.2 22.586,4.922 24.375,6.711 24.375,32.953 23.876,33.453 v1(23.876,33.528)
NetJ4_3: J4.3 U5.13 | length 33.9
  Top Layer w0.22: U5.13 20.267,34.002 22.572,34.002 v1(22.606,34.036)
  Bottom Layer w0.22: J4.3 20.375,4.881 24.003,8.509 24.003,32.639 v1(22.606,34.036)
NetJ5_2: J5.2 U5.11 | length 27.1
  Top Layer w0.22: U5.11 21.559,32.982 v1(21.571,32.97)
  Bottom Layer w0.22: J5.2 18.756,22.566 21.571,25.381 v1@21.571,32.949
NetJ5_3: J5.3 U5.10 | length 24.1
  Top Layer w0.22: U5.10 20.253,32.476 21.032,32.476 v1(21.038,32.47)
  Bottom Layer w0.22: J5.3 20.113,25.066 21.038,25.991 v1(21.038,32.47)
NetJ6_2: J6.2 U4.10 | length 28.8
  Top Layer w0.22: U4.10 40.243,32.655 40.624,32.274 40.624,4.885 J6.2
NetJ6_3: J6.3 U4.11 | length 35.9
  Top Layer w0.22: J6.3 38.12,3.917 38.735,3.302 41.021,3.302 41.783,4.064 41.783,6.35 41.021,7.112 41.021,32.639 40.505,33.155 U4.11
NetR7_2: R7.2 R8.2 U.7 | length 4
  Bottom Layer w0.22: R8.2 R7.2 36.562,25.603 36.881,25.603 37.465,25.019 U.7
SCL: B1.36 J2.1 R3.1 U.6 | length 35.4
  Top Layer w0.22: v1(32.131,26.67) 32.153,26.648 33.299,26.648 B1.36
  Layer 2 w0.22: v1(32.131,26.67) 32.906,26.67 35.7,23.876 v1(36.576,23.876) 46.355,14.097 J2.1
  Bottom Layer w0.22: v1(36.576,23.876) 36.703,23.749 U.6
SDA: B1.35 J2.2 R4.1 U.5 | length 37.3
  Top Layer w0.22: v1(31.623,26.035) 31.674,26.086 33.281,26.086 B1.35
  Layer 2 w0.22: v1(31.623,26.035) 33.014,26.035 36.57,22.479 v1(36.576,22.479) 47.498,11.557 J2.2
  Bottom Layer w0.22: R4.1 v1(36.576,22.479) U.5
USB_D_N: B1.42 J1.A7 J1.B7 U1.6 | length 20.3
  Top Layer w0.271: J1.A7 28.593,44.159 28.593,44.787 28.81,45.003 29.348,45.003 29.565,44.787 J1.B7@29.565,44.309 ; B1.42 29.347,28.128 29.347,29.031 29.591,29.275 v1(29.591,29.337) ; J1.B7@29.565,44.131 29.565,43.682 29.545,43.662 29.545,42.145 29.045,41.645 29.045,40.005 30.188,38.862 v1(30.226,38.862)
  Layer 2 w0.221: v1(29.591,29.337) 29.319,29.609 29.319,33.678 29.065,33.932 29.065,38.354 29.573,38.862 v1(30.226,38.862)
  Bottom Layer w0.271: U1.6 30.204,38.884 v1(30.226,38.862)
USB_D_P: B1.43 J1.A6 J1.B6 U1.1 | length 19.7
  Top Layer w0.271: v1(27.432,38.862) 27.47,38.862 28.613,40.005 28.613,41.824 29.113,42.324 29.113,43.456 29.093,43.476 J1.A6@29.093,44.131 ; J1.B6 28.093,44.131 28.093,43.503 28.31,43.287 28.848,43.287 29.017,43.456 ; v1(28.575,29.337) 28.575,29.275 28.819,29.031 28.819,28.128 B1.43
  Layer 2 w0.221: v1(27.432,38.862) 28.085,38.862 28.593,38.354 28.593,33.737 28.847,33.483 28.847,29.609 v1(28.575,29.337)
VCCB_BANK1: C16.1 J3.1 J6.1 P1.1 U4.14 | length 68.5
  Top Layer w0.22: U4.14 38.461,36.937 C16.1
  Top Layer w0.5: C16.1 38.481,38.354 39.624,39.497 46.863,39.497 ; J6.1 45.902,4.881 46.863,5.842 v1(46.863,25.146) ; P1.1 46.863,39.497 ; J3.1 49.356,27.479 v1(46.863,29.972) 46.863,39.497
  Bottom Layer w0.5: v1(46.863,25.146) v1(46.863,29.972)
VCCB_BANK2: C18.1 J4.1 J5.1 P2.1 U5.14 | length 73.2
  Top Layer w0.22: U5.14 19.312,36.907 C18.1
  Top Layer w0.5: J5.1 11.049,20.066 ; P2.1 11.049,39.116 ; C18.1@19.324,36.944 19.324,38.715 18.923,39.116 11.049,39.116 ; J4.1 25.086,7.299 24.638,7.747 13.462,7.747 11.049,10.16 11.049,20.066 ; 11.049,20.066 11.049,39.116
pads on no net: B1.2 B1.3 B1.6 B1.7 B1.10 B1.11 B1.12 B1.13 B1.14 B1.15 B1.16 B1.17 B1.20 B1.21 B1.24 B1.25 B1.26 B1.27 B1.28 B1.29 B1.34 B1.37 B1.46 B1.47 B1.48 J1. J1.A8 J1.B8 U1.3 U1.4 U4.6 U4.9 U5.6 U5.9

## Polygon pours and split planes (outlines as drawn)
GND on Bottom Layer "GND_L04_P011" (solid, pour order 11): 60.452,50.99 60.452,0.826 0.381,0.826 0.381,50.863 0.508,50.99 0.381,50.863 0.508,50.99
+5V on Bottom Layer "+5V_L04_P001" (solid, pour order 1): 28.829,43.688 28.829,39.37 31.496,39.37 31.496,43.688
+5V on Bottom Layer "+5V_L04_P000" (solid, pour order 0): 2.044,50.292 2.044,42.594 4.33,42.594 4.33,45.007 22.745,45.007 22.745,47.674 22.745,43.61 45.224,43.61 45.224,45.466 52.844,45.466 52.844,37.26 55.13,37.26 55.13,50.292
GND on Layer 1 "GND_L02_P010" (solid, pour order 10): 60.833,51.181 60.833,1.016 0.762,1.016 0.762,51.054 0.889,51.181 0.762,51.054 0.889,51.181
+3V3 on Layer 1 "+3V3_L02_P007" (solid, pour order 7): 17.34,16.256 37.211,16.256 37.211,29.21 39.624,29.21 39.624,30.607 39.497,30.734 35.814,30.734 35.814,36.195 35.828,36.209 38.275,36.209 38.275,41.323 38.354,41.402 38.1,41.656 18.923,41.656 18.923,37.973 17.145,37.973 17.145,35.941 20.498,35.941 20.498,31.369 17.34,31.369
+3V3 on Layer 1 "+3V3_L02_P005" (solid, pour order 5): 39.791,43.434 39.791,39.987 19.071,39.987 18.923,40.135 18.923,44.704 12.319,44.704 12.065,44.958 12.065,48.387 23.368,48.387 23.495,48.26 23.495,43.434
+3V3 on Layer 1 "+3V3_L02_P002" (solid, pour order 2): 38.227,43.434 47.498,43.434 47.498,48.387 50.927,48.387 50.927,40.005 50.909,39.987 39.791,39.987 39.791,41.87
GND on Layer 2 "GND_L03_P012" (solid, pour order 12): 60.325,50.99 60.325,0.826 0.254,0.826 0.254,50.863 0.381,50.99 0.254,50.863 0.381,50.99
+1V8 on Layer 2 "+1V8_L03_P004" (solid, pour order 4): 48.387,50.546 48.387,47.752 37.846,47.752 37.239,47.145 37.239,40.005 7.747,40.005 7.747,50.419 12.446,50.419 12.446,47.752 9.779,47.752 9.779,43.942 34.036,43.942 34.036,50.546
GND on Top Layer "GND_L01_P009" (solid, pour order 9): 60.579,51.181 60.579,1.016 0.508,1.016 0.508,51.054 0.635,51.181 0.508,51.054 0.635,51.181

## Silkscreen, mask and mechanical layers (free items; w line width, h text height)
Top Overlay:
  drawing of 9 lines, arcs and shapes, not listed
  text "USB" at 33.909,49.802 h1.52
  text "UART IC" at 19.812,18.814 h1.52
  text "SCL" at 54.102,13.607 h1.52
  text "SDA" at 53.975,11.067 h1.52
Bottom Overlay:
  text "1v8" at 45.339,49.421 h1.52
  text "5V" at 52.705,49.294 h1.52
  text "5V" at 17.018,49.167 h1.52
  text "1v8" at 9.779,48.913 h1.52
  text "3V3" at 53.34,46.119 h1.52
  text "COM2" at 9.779,45.992 h1.52
  text "COM1" at 45.339,45.992 h1.52
  text "3V3" at 17.653,45.865 h1.52
  text "GND" at 9.398,27.196 h1.52
  text "VCC BANK1" at 54.737,27.068 h1.52
  text "RX" at 9.525,24.511 h1.52
  text "TX" at 54.737,24.511 h1.52
  text "RX" at 54.864,22.098 h1.52
  text "TX" at 9.017,21.971 h1.52
  text "GND" at 54.61,19.449 h1.52
  text "VCC BANK2" at 14.351,19.321 h1.52
  text "VCC BANK1" at 43.671,14.732 h1.52 r90
  text "VCC BANK2" at 25.637,14.478 h1.52 r90
  text "RX" at 20.447,9.779 h1.52 r90
  text "GND" at 18.143,9.652 h1.52 r90
  text "RX" at 41.529,9.398 h1.52 r90
  text "TX" at 22.987,9.271 h1.52 r90
  text "GND" at 36.177,9.271 h1.52 r90
  text "TX" at 38.608,9.017 h1.52 r90
Mechanical 1:
  the board outline again, w0.254

## Text inside footprints (layer, text, board x,y; h text height)
J1: Mechanical 13 "PCB EDGE" at 23.629,50.795 h0.61 r180
J3: Mechanical 13 "PCB Edge" at 49.466,17.062 h0.81 r270
J4: Mechanical 13 "PCB Edge" at 14.668,12.184 h0.81 r180
J5: Mechanical 13 "PCB Edge" at 11.874,30.484 h0.81 r90
J6: Mechanical 13 "PCB Edge" at 32.703,12.184 h0.81 r180